# Altium PCB tuch-tara-ir.PcbDoc
Units mm, origin at the board's own origin, x right, y up, seen from the top; angles counter-clockwise.
Board outline 151 x 86.38 mm, 2 copper layers (Top Layer, Bottom Layer); 19 components, 18 nets, 49 pads, 0 vias.
Unrouted connection lines stored in the file: 3.
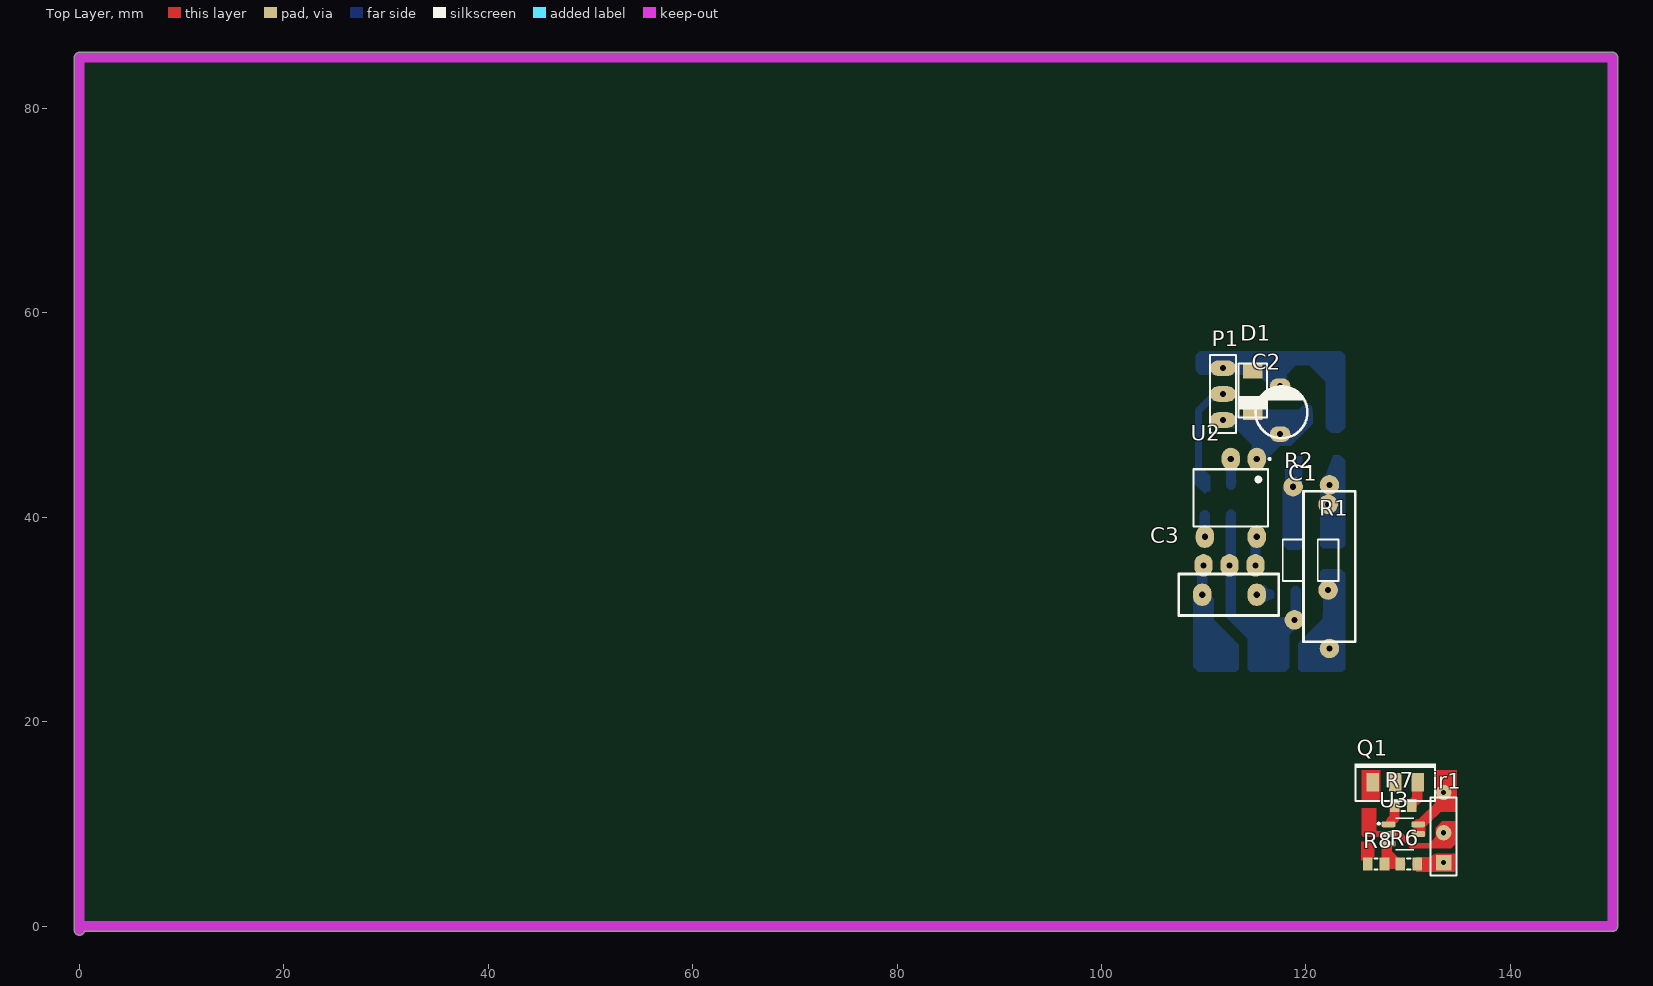
[diagram p0: Top Layer view]
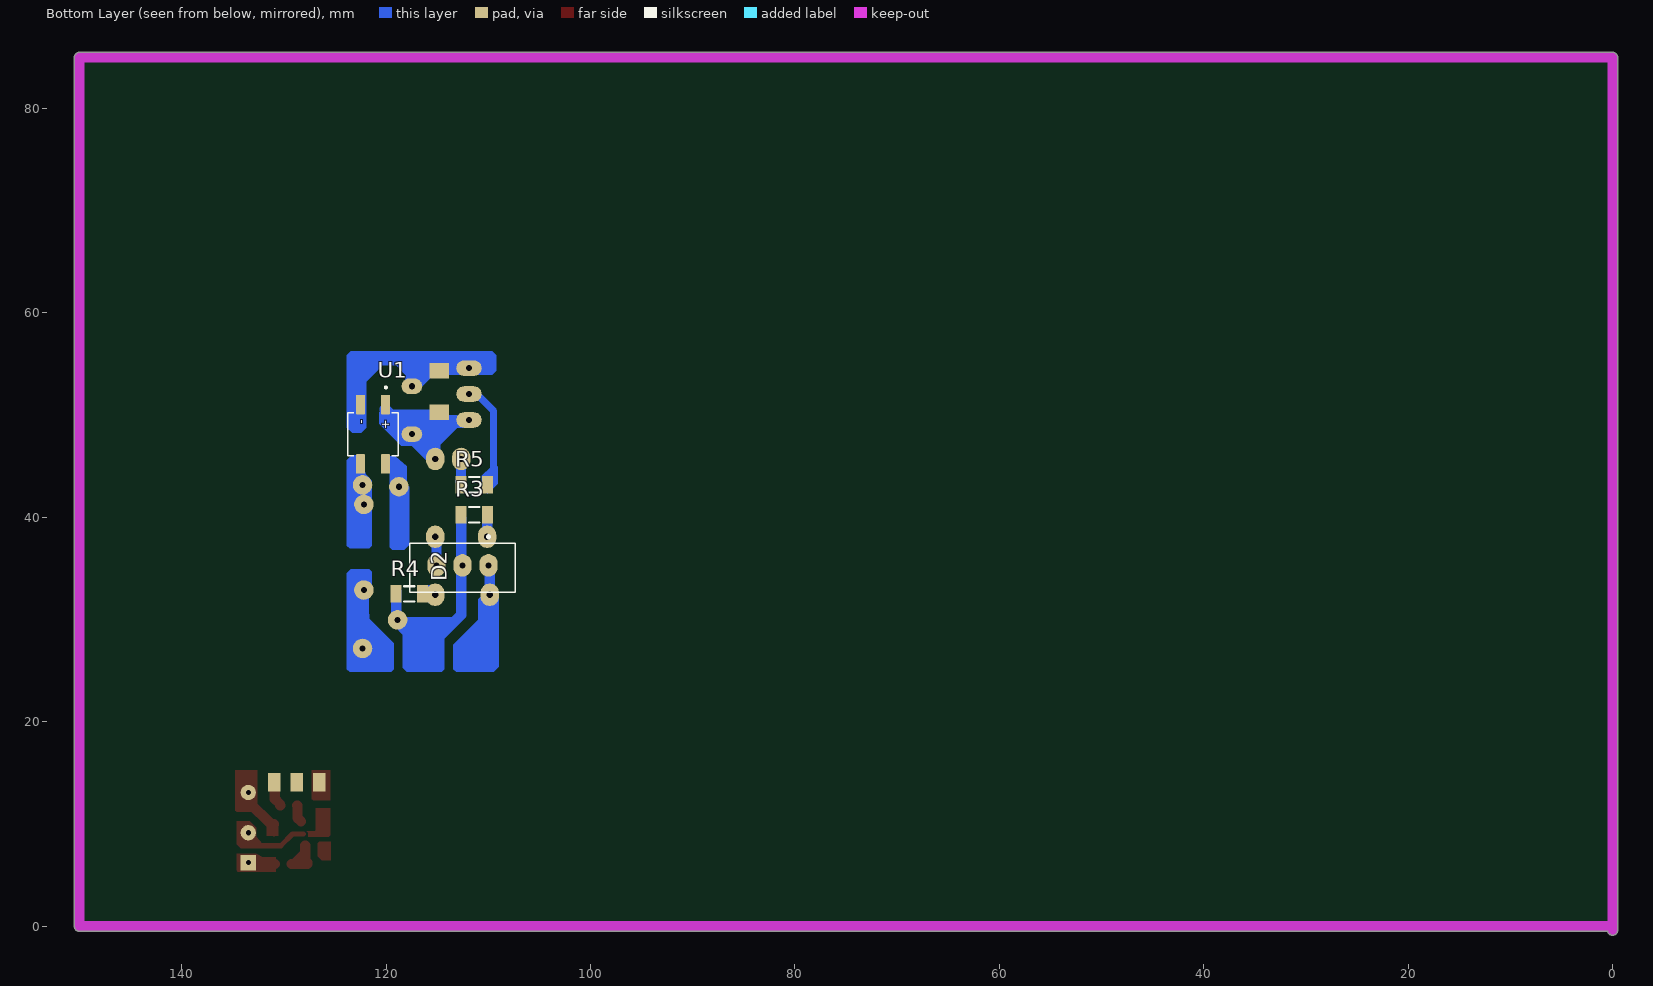
[diagram p1: Bottom Layer view, seen from below]
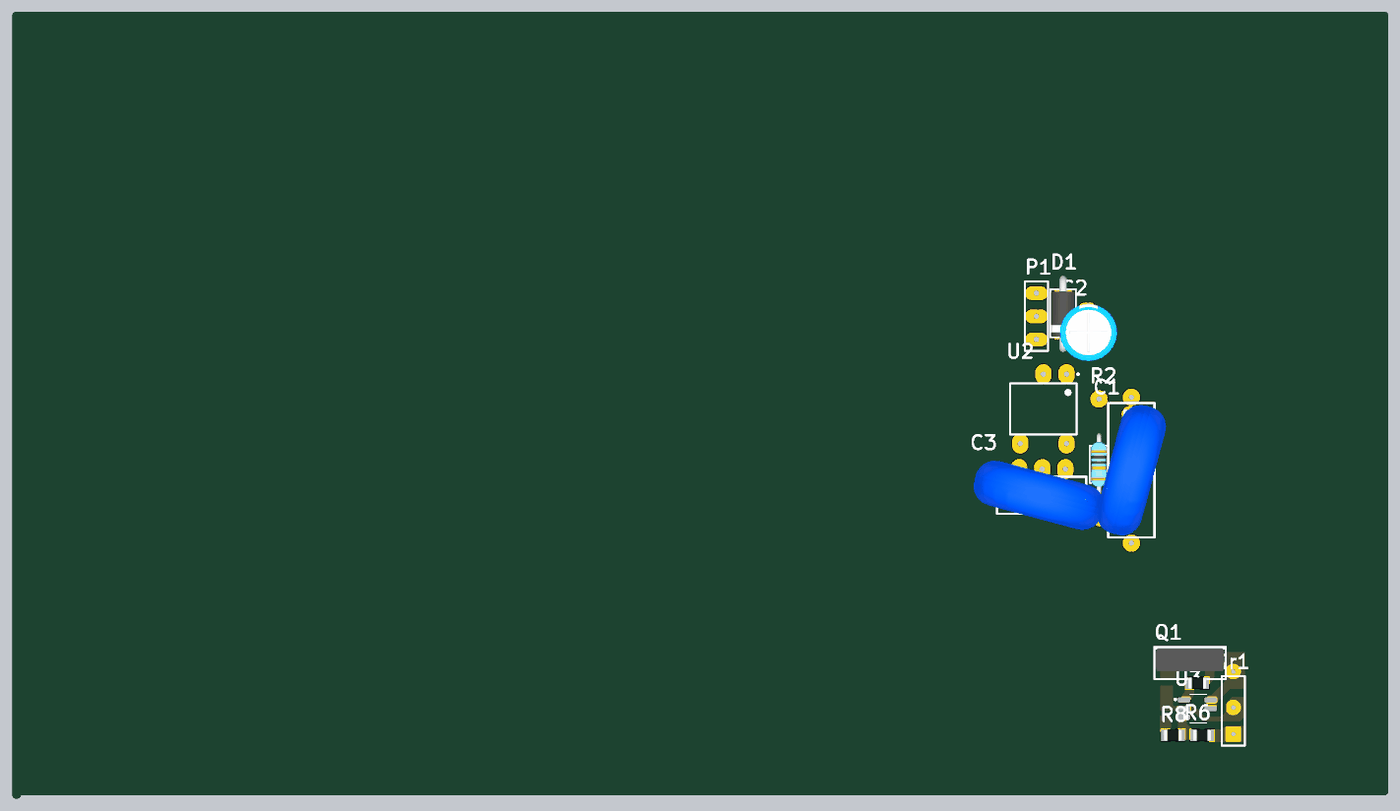
[diagram p2: 3D render of the assembled board from above, using the file's embedded part models]
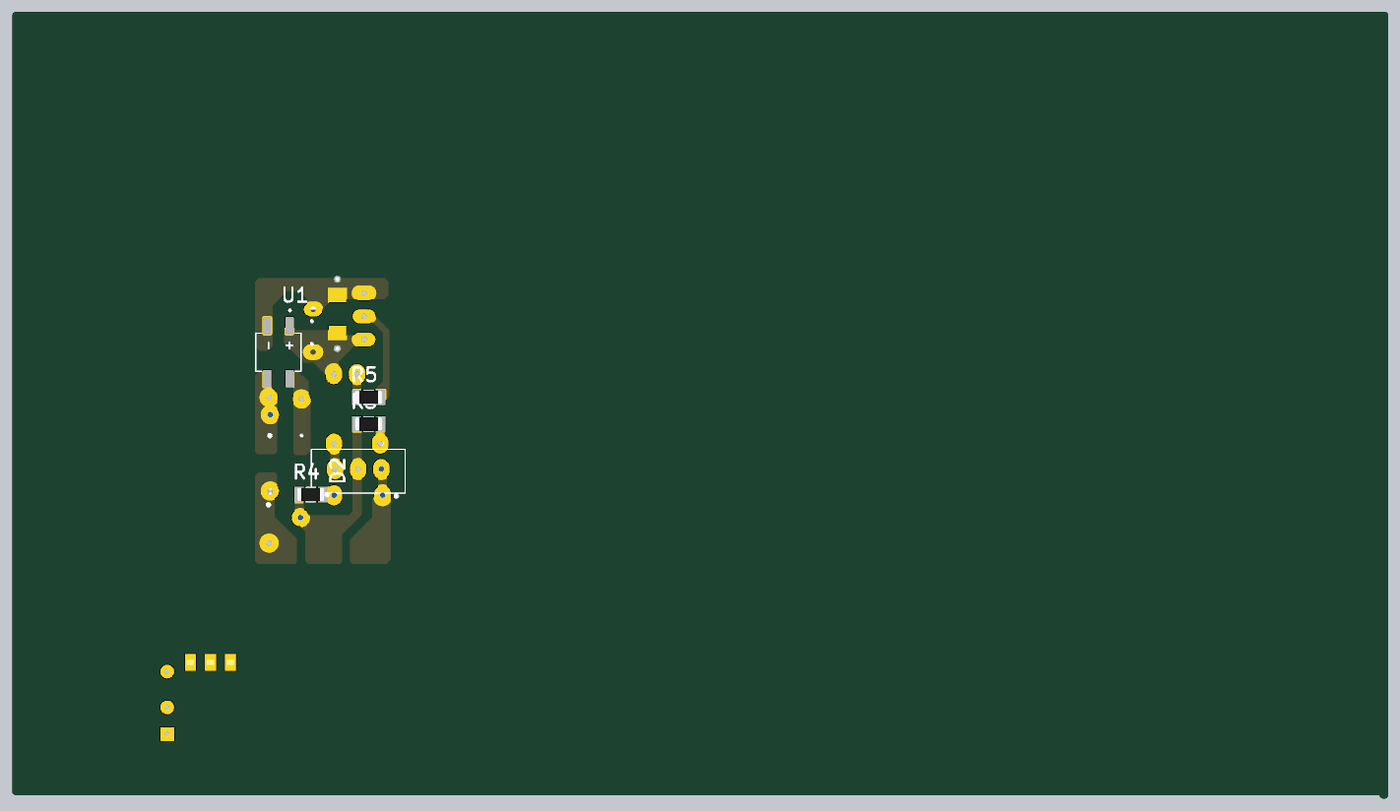
[diagram p3: 3D render of the assembled board from below, using the file's embedded part models]

## Layer stack, top to bottom
Top Solder: solder mask 0.0102, Solder Resist, Dk 3.5
Top Layer: signal copper 0.0356
Dielectric 1: dielectric 0.32, FR-4, Dk 4.8
Bottom Layer: signal copper 0.0356
Bottom Solder: solder mask 0.0102, Solder Resist, Dk 3.5

## Board outline
-0.5,-0.381 -0.5,85 cw(c0,85) 0,85.5 150,85.5 cw(c150,85) 150.5,85 150.5,0 cw(c150,0) 150,-0.5 0.486,-0.5 cw(c0,-0.381)

## Design rules (kind name [scope] priority, off if disabled: settings)
Clearance Clearance_1 [InPolygon] p1: gap=0.8 ignorepadtopadclearanceinfootprint=FALSE
Clearance [All] p2: gap=0.254 ignorepadtopadclearanceinfootprint=FALSE except(0: Arc-Hole Track-Hole SMDPad-Hole THPad-Hole Via-Hole Fill-Hole Poly-Hole Region-Hole Text-Hole)
PolygonConnect [All] p1: connectstyle=Relief reliefconductorwidth=0.254 reliefentries=4 polygonreliefangle="90 Angle" airgapwidth=0.254
RoomDefinition tuch-tara-ir [InComponentClass('tuch-tara-ir')] p1: confinementstyle=ConfineIn formatcopy=TRUE lockcomponents=FALSE outline 144.907,-4.953 247.904,-4.953 247.904,23.114 144.907,23.114
RoutingLayers [All] p1: top layer_v5=FALSE bottom layer_v5=TRUE
RoutingVias [All] p1: holewidth=0.711 width=2.5 viastyle="Through Hole" minholewidth=0.711 minwidth=1.27 maxholewidth=0.711 maxwidth=2
SolderMaskExpansion [All] p1: expansion=0.102 istentingtop=FALSE
Width [All] p1: maxlimit=3 minlimit=0.5 preferedwidth=1
29 further rules are at their usual default settings.

## Components (designator, comment, footprint, x,y, rotation, side; value= is the part's Value field where it differs from the comment)
C1 "=Value" CAP-30#1 122.301,35.179 r90 top
C2 "=Value" ELEC-CAP-RAD10-20 117.602,50.292 r270 top
C3 "=Value" CAP-30#2 112.141,32.431 r0 top
D1 "MODEL" DO-41 114.808,56.134 r270 top
D2 "BTA16-600CW3G" *TO254P1028X482X1968-3 109.982,35.306 r0 bottom
ir1 "Header 3" HDR1X3#1 133.477,6.223 r90 top
P1 "Header 3" HDR1X3#2 111.887,54.61 r270 top
Q1 "MODEL" SOT32 128.737,14.097 r0 top
R1 "10K" Res-(1/4)#1 122.174,35.814 r270 top
R2 "10K" Res-(1/4)#2 118.745,35.814 r270 top
R3 "10K" "RES 1206 (3216X08L)" 111.379,40.259 r0 bottom
R4 "10K" "RES 1206 (3216X08L)" 117.729,32.512 r0 bottom
R5 "10K" "RES 1206 (3216X08L)" 111.379,43.18 r0 bottom
R6 "10K" "RES 0805 (2012X06L)" 130.048,6.096 r180 top
R7 "10K" "RES 0805 (2012X06L)" 129.54,11.811 r0 top
R8 "10K" "RES 0805 (2012X06L)" 126.873,6.096 r0 top
U1 "MB6S" SOIC245P670X270-4N 121.285,48.133 r270 bottom
U2 "K3021P" DIP762W50P254L730H410Q6 112.649,41.91 r270 top
U3 "TTP223_" SOT95P285X126-6N 129.667,9.017 r0 top

## Footprints (in the part's own frame and the unit in brackets; to place one, negate y for a bottom-side part, rotate by r counter-clockwise, add the part's x,y. Pads: shape width x height; smd on the part's side, far side on the other; paste and mask are expansions set on the pad)
*TO254P1028X482X1968-3 [mm]
  oval 1.8x2.2 hole 0.6: 1(0,0) 2(2.54,0) 3(5.08,0)
  silkscreen extent -2.6,-2.9 7.68,2.64
CAP-30#1 [mm]
  round 1.905 hole 0.6: 1(-8.001,0) 2(8.001,0)
  silkscreen extent -7.37,-2.54 7.37,2.54, body extent -7.65,-4.29 7.65,4.29, height 17.96
CAP-30#2 [mm]
  oval 1.8x2.2 hole 0.6: 1(-2.286,0) 2(3.048,0)
  silkscreen extent -4.57,-2.03 5.21,2.03, body extent -7.65,-4.29 7.65,4.29, height 17.96
DIP762W50P254L730H410Q6 [mm]
  oval 2.2x1.79 hole 0.6: 1(-3.81,2.54) 2(-3.81,0) 4(3.81,-2.54) 6(3.81,2.54)
  silkscreen extent -3.9,-3.65 2.8,3.9
DO-41 [mm]
  rect 1.5x1.905 all layers, no hole: 1(1.778,0) 2(5.842,0)
  silkscreen extent 1.1,-1.5 6.35,1.5, body extent -0.41,-1.33 8,1.33, height 3.33
ELEC-CAP-RAD10-20 [mil]
  oval 60x80 hole 23.62: 1(-100,-5) 2(84.65,-5)
  silkscreen extent -100,-100 100,100, body extent -124,-124 124,124, height 404
HDR1X3#1 [mm] "Connector; Header; 3 Position"
  rect 1.5x1.5 hole 0.5: 1(0,0)
  round 1.5 hole 0.5: 2(2.921,0) 3(6.858,0)
  silkscreen extent -1.27,-1.27 6.35,1.27
HDR1X3#2 [mm] "Connector; Header; 3 Position"
  oval 1.524x2.5 hole 0.6: 1(0,0) 2(2.54,0) 3(5.08,0)
  silkscreen extent -1.27,-1.27 6.35,1.27
"RES 0805 (2012X06L)" [mm] "Chip Resistor, 2-Leads, Body 2.0x1.3mm, IPC High Density _ (0.100 W)"
  rect 0.95x1.3 smd: 1(-0.838,0) 2(0.812,0)
  silkscreen extent -0.16,-0.55 0.14,0.55, body extent -1.03,-0.63 1,0.64, height 0.6
"RES 1206 (3216X08L)" [mm] "Chip Resistor, 2-Leads, Body 3.2x1.6mm, IPC High Density _ (0.125 W)"
  rect 1.05x1.7 smd: 1(-1.295,0) 2(1.301,0)
  silkscreen extent -0.5,-0.75 0.5,0.75, body extent -1.52,-0.76 1.53,0.76, height 0.6
Res-(1/4)#1 [mm]
  round 1.905 hole 0.6: 1(-5.461,0) 2(2.921,0)
  silkscreen extent -2.03,-1.02 2.03,1.02, body extent -3.43,-0.93 3.43,0.91, height 2.92
Res-(1/4)#2 [mm]
  round 1.905 hole 0.6: 1(-7.186,0) 2(5.842,0.127)
  silkscreen extent -2.03,-1.02 2.03,1.02, body extent -3.43,-0.93 3.43,0.91, height 2.92
SOIC245P670X270-4N [mm]
  rrect23% 1.91x0.91 smd: 1(-2.9,1.225) 2(-2.9,-1.225) 3(2.9,-1.225) 4(2.9,1.225)
  silkscreen extent -4.68,-2.48 2.1,2.48
SOT32 [mm] "SIP with Mounting Hole; 3 Leads; Body 10.7 x 7.6 x 2.6 mm (typ); Pitch 2.2 mm"
  rect 1.2x1.8 all layers, no hole: 1(-2.2,0) 2(0,0) 3(2.2,0)
  silkscreen extent -4,-1.85 4,1.8, body extent -3.8,-1 3.8,1.55, height 15.19
SOT95P285X126-6N [mm]
  rrect50% 1.35x0.57 smd: 1(-1.586,0.95) 2(-1.586,0) 3(-1.586,-0.95) 5(1.314,0) 6(1.314,0.95)
  silkscreen extent -2.64,-1.56 0.9,1.56

## Part data
C1 C3: library part Capacitor, "Capacitor"
C2: library part "Capacitor Electrolytic", "Electrolytic Capacitor"
D1: library part Diode, "Diode", MODEL=1N4148
D2: "TRIAC Standard 600V 16A Through Hole TO-220AB", Package="TO-220 ON Semiconductor", Arrow_Americas-Purchase-URL=https://snapeda.com/shop?store=Arrow+Americas&id=390940, Availability=Unavailable, DigiKey-Purchase-URL=https://snapeda.com/shop?store=DigiKey&id=390940, MF="Littelfuse Inc.", Mouser-Purchase-URL=https://snapeda.com/shop?store=Mouser&id=390940, MP=BTA16-600CW3G, Price=None, SnapEDA_Link=https://www.snapeda.com/parts/BTA16-600CW3G/Littelfuse%20Inc./view-part/390940/?ref=snap
ir1 P1: "Header, 3-Pin", LatestRevisionDate=17-Jul-2002, LatestRevisionNote="Re-released for DXP Platform.", Publisher="Altium Limited"
Q1: library part BD139, "NPN Bipolar Transistor"
R1 R2 R3 R4 R5 R6 R7 R8: library part Resistor, "Resistor", Power="1/4 W", Tolerance=5%
U1: "Bridge Rectifier Single Phase Standard 600V Surface Mount 4-SOIC", Package="BESOP-4 Surge Components", Digi-Key_Part_Number=MB6SCT-ND, Digi-Key_Purchase_URL=https://www.digikey.com.tr/product-detail/en/on-semiconductor/MB6S/MB6SCT-ND/965654?utm_source=snapeda&utm_medium=aggregator&utm_campaign=symbol, MF="ON Semiconductor", MP=MB6S, SnapEDA_Link=https://www.snapeda.com/parts/MB6S/ON%20Semiconductor/view-part/2774209/?ref=snap
U2: "Optoisolator Triac Output 5300Vrms 1 Channel 6-DIP", Package="DIP-6 Vishay", Availability=Unavailable, DigiKey-Purchase-URL=https://snapeda.com/shop?store=DigiKey&id=291595, MF="Vishay Semiconductor", Mouser-Purchase-URL=https://snapeda.com/shop?store=Mouser&id=291595, MP=K3021P, Price=None, SnapEDA_Link=https://www.snapeda.com/parts/K3021P/Vishay%20Semiconductor%20Opto%20Division/view-part/291595/?ref=snap
U3: "22 kOhms Â±5% 0.1W, 1/10W Chip Resistor 0402 _1005 Metric_ Automotive AEC-Q200, Moisture Resistant Thick Film", Package="0402 KOA Speer", Availability=Unavailable, MF="KOA Speer", MP=TTP223, Price=None, SnapEDA_Link=https://www.snapeda.com/parts/TTP223%20/KOA%20Speer/view-part/2780209/?ref=snap

## Nets (pads, with @x,y where several pads share a name; then routed paths per layer and width w, separated by ;. In a path a pad name is that pad's centre, name@x,y a point inside that pad or via, vN(x,y) a via of type N, cw(c..) or ccw(c..) an arc to the next point about the centre after c; other vN are vias at no path point)
faz: D2.2 R2.2 R3.2 R4.2 | length 21.7
  Bottom Layer w1: R3.2 112.68,39.934 112.649,39.903 112.649,35.433 D2.2 112.649,35.179 112.649,30.48 115.727,27.402 116.556,27.402 118.42,29.265 118.42,29.275 118.872,29.727 R2.2 118.999,30.099 118.999,32.766 119.03,32.735 R4.2
GND: C2.1 D1.1 ir1.2 P1.1 U1.2 U3.2 | length 23.2
  Top Layer w0.5: U3.2 129.159,9.017 130.302,7.874 132.207,7.874 ir1.2
  Bottom Layer w1: P1.1 111.987,54.71 112.846,54.71 112.873,54.737 116.967,54.737 117.094,54.864 ; C2.1 117.363,52.832 117.121,53.074 117.121,53.186 117.094,53.213 117.094,54.864 ; U1.2@122.637,51.033 122.682,51.078 122.682,53.213 120.142,55.753 118.132,55.753 117.546,55.167 117.546,55.114 117.296,54.864 117.094,54.864
ir: ir1.1 R6.1 | length 2.6
  Top Layer w1: R6.1 133.35,6.096 ir1.1
NetC1_2: C1.2 R1.1 U1.3 | length 2
  Bottom Layer w1: R1.1 122.237,41.338 122.237,43.116 C1.2
NetC3_1: C3.1 D2.1 | length 2.6
  Bottom Layer w1: C3.1@109.855,32.766 109.855,35.179 D2.1
NetC3_2: C3.2 R4.1 | length 1.3
  Bottom Layer w1: C3.2 115.23,32.471 116.409,32.471 116.434,32.496 R4.1
NetD2_3: D2.3 U2.6 | length 3
  Bottom Layer w1: D2.3 115.062,37.865 115.112,37.915 U2.6@115.112,38.285
NetP2_2: R8.1
NetP3_1: Q1.1
NetQ1_3: Q1.3 R7.2 | length 2.5
  Top Layer w1: R7.2 130.377,11.836 130.377,11.961 130.892,12.476 Q1.3@130.892,14.097
NetR2_1: R2.1 U1.4 | length 1.2
  Bottom Layer w1: 118.745,42.037 118.918,42.21 R2.1@118.918,43.173
NetR3_1: R3.1 U2.4 | length 2.1
  Bottom Layer w1: U2.4 110.096,38.113 110.096,40.216 R3.1@110.109,40.228
NetR5_2: R5.2 U2.2 | length 3
  Bottom Layer w1: R5.2@112.705,43.53 112.68,43.505 R5.2 112.664,43.195 112.664,45.705 U2.2 U2.2@112.726,45.797
NetR6_2: R6.2 R8.2 U3.3 | length 3.1
  Top Layer w1: R8.2@127.685,6.221 R8.2 R6.2 ; R8.2@127.906,6.442 U3.3@127.906,7.892
NetR7_1: R7.1 U3.1 | length 1.7
  Top Layer w1: U3.1@128.315,10.242 128.677,10.603 128.677,11.786 R7.1
nol: C1.1 R1.2 | length 5.4
  Bottom Layer w1: R1.2@122.174,32.512 122.174,27.305 C1.1
o1: P1.2 R5.1 | length 9.6
  Bottom Layer w0.7: R5.1@110.156,43.434 109.474,44.116 109.474,50.419 P1.2@111.125,52.07
VCC: C2.2 D1.2 ir1.3 P1.3 Q1.2 U1.1 U2.1 U3.5 U3.6 | length 20.4
  Top Layer w0.5: U3.5 130.981,9.932 131.016,9.967 U3.6@131.371,9.967
  Top Layer w1: U3.6 131.252,9.967 133.381,12.096 133.381,12.985 ir1.3
  Bottom Layer w1: 113.162,49.53 114.222,49.53 114.437,49.745 114.437,50.042 114.687,50.292 D1.2 ; D1.2@115.062,50.038 D1.2@115.189,50.038 ; U2.1 D1.2@115.189,50.038 ; D1.2@115.189,50.042 D1.2@115.189,50.038 ; D1.2@115.26,50.042 D1.2@115.264,50.038 ; C2.2 117.16,48.142 D1.2@115.264,50.038 ; U1.1@120.142,50.578 120.047,50.578 119.507,50.038 D1.2@115.264,50.038 ; D1.2@115.189,50.038 D1.2@115.264,50.038

## Polygon pours and split planes (outlines as drawn)
GND on Bottom Layer "GND_L02_P002" (solid, pour order 2): 116.332,39.751
no net on Bottom Layer "NONET_L02_P000" (solid, pour order 0): 91.059,37.973

## Keep-outs
Keep-Out Layer:
  lines w1: 0,-0.381 0,85 150,85 150,0 0,0

## Other copper
Top Layer:
  region net NetR6_2: 128.27,7.493 129.286,6.477 129.286,6.146 129.236,6.096 127.685,6.096 127.762,6.173 127.762,7.62
  region: 134.493,6.477
  region: 134.493,6.477
  region net ir: 133.477,6.477
  region net ir: 131.318,6.731 131.445,6.731 131.064,6.35
  region net ir: 132.715,7.112 134.62,7.112 134.62,5.461 134.493,5.334 130.81,5.334 130.81,6.731 132.08,6.731
  region net GND: 132.715,8.763 132.715,9.652 133.35,10.287 134.62,10.287 134.62,8.001 134.239,7.62 131.699,7.62 131.826,7.747
  region net VCC: 130.556,8.826 130.556,10.223 130.683,10.351 131.445,10.351 131.699,10.096 131.699,8.826
  region net NetP2_2: 125.412,8.255 126.555,8.255 126.682,8.128 126.682,6.858 126.301,6.477 125.412,6.477
  region net GND: 126.873,11.557 125.476,11.557 125.476,8.89 125.603,8.763 127.635,8.763 127.635,9.144 127.762,9.271 127,9.271 126.873,9.398
  region net NetP3_1: 127.254,15.24 125.476,15.24 125.476,12.319 127.127,12.319 127.254,12.446
  region net VCC: 132.588,11.176 134.62,11.176 134.747,11.303 134.747,15.24 132.588,15.24
Bottom Layer:
  region net GND: 116.459,52.832 115.316,53.975 109.601,53.975 109.22,54.356 109.22,55.88 109.601,56.261 120.904,56.261 121.285,55.88 121.285,54.864 118.999,54.864 118.11,53.975 118.11,52.832
  region net VCC: 114.681,46.609 114.681,47.117 113.03,48.768 112.395,48.768 112.395,49.276 112.776,49.657 115.57,49.657 116.332,50.419 120.523,50.419 120.65,50.292 120.65,49.149 118.491,46.99 117.475,46.99 115.697,45.212 115.697,45.085
  region net NetR2_1: 119.634,44.526 119.634,37.084 119.38,36.83 118.237,36.83 117.729,37.338 117.729,43.002
  region net nol: 121.666,34.925 121.412,34.671 121.412,32.893 122.174,32.131 122.174,31.559 122.492,31.242 123.825,31.242 123.825,33.147 123.825,34.544 123.444,34.925
  region net NetC1_2: 123.509,45.909 123.825,45.593 123.825,37.211 123.571,36.957 121.666,36.957 121.412,37.211 121.412,43.596
  region: 123.444,44.45
  region net GND: 120.142,56.261 123.444,56.261 123.825,55.88 123.825,48.768 123.317,48.26 122.428,48.26 121.92,48.768 121.92,54.209
  region net NetC3_2: 114.466,32.056 115.788,31.659 116.967,32.131 115.969,33.383 115.461,33.383
  region net NetR2_1: 119.634,45.974 119.634,40.513 117.983,42.164 117.983,44.993 119.126,45.974
  region net NetC1_2: 122.682,46.101 121.666,43.307 121.412,43.053 121.412,41.275 122.047,40.64 122.428,40.64 122.428,40.767 123.667,45.751 123.317,46.101
  region net o1: 109.728,45.212 109.728,44.958 110.617,44.069 110.617,42.545 110.363,42.545 110.109,42.291 109.093,43.307 109.093,44.958 109.347,45.212
  region net faz: 112.411,30.21 114.3,28.321 114.3,25.146 114.554,24.892 117.983,24.892 118.364,25.273 118.364,29.972 118.11,30.226 112.42,30.226
  region net NetC3_1: 108.966,32.766 108.966,25.4 109.474,24.892 113.157,24.892 113.411,25.146 113.411,27.559 110.998,29.972 110.998,32.004 110.236,32.766
  region net nol: 121.666,30.48 121.666,30.099 119.253,27.686 119.253,25.146 119.507,24.892 123.571,24.892 123.825,25.146 123.825,31.496 122.682,32.639

## Text inside footprints (layer, text, board x,y; h text height)
U1: Bottom Overlay "+" at 120.395,49.532 h0.81 r90; Bottom Overlay "-" at 122.685,49.533 h0.81 r90